# Altium PCB YLCmarlin.PcbDoc (part 2 of 3)
Units mm, origin at the board's own origin, x right, y up, seen from the top; angles counter-clockwise.
Board outline 129.92 x 100.67 mm, 2 copper layers (Top Layer, Bottom Layer); 209 components, 193 nets, 781 pads, 1168 vias.
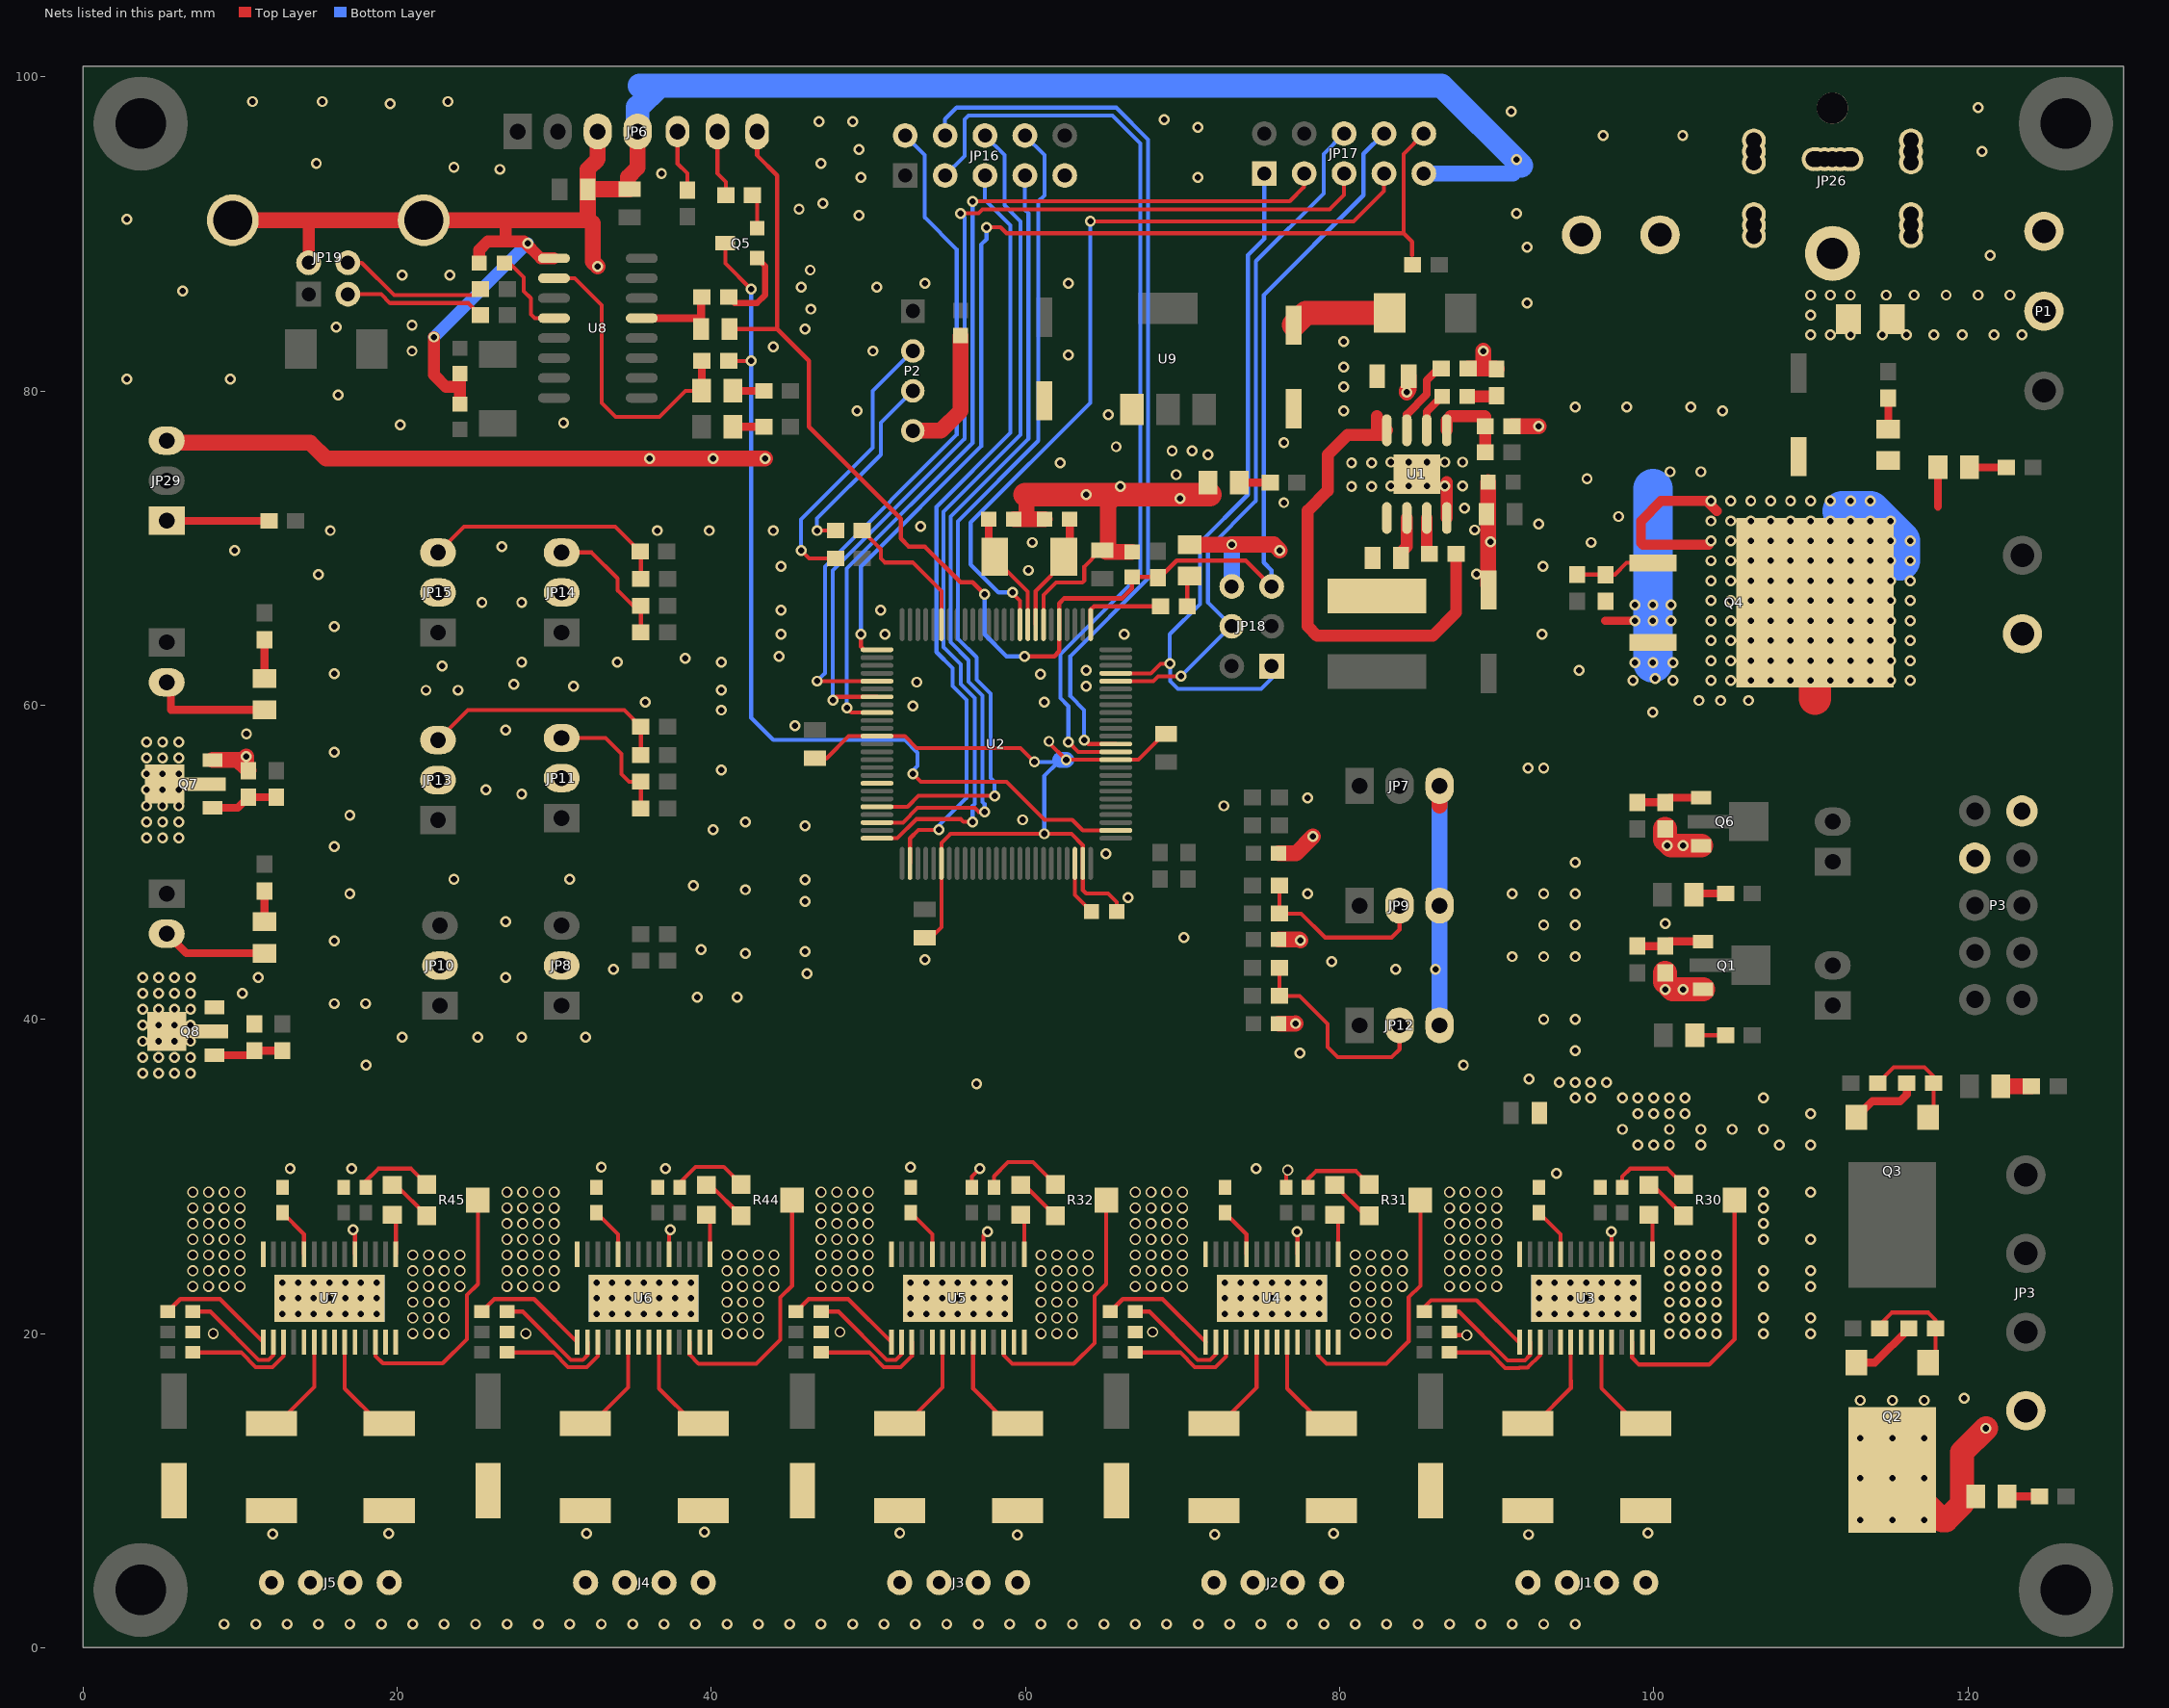
[diagram p2: the nets of this part, all layers, seen from the top]

## Via types
v1: diameter 0.7, hole 0.4, Top Layer to Bottom Layer, tented both sides, 830 vias
v2: diameter 0.7, hole 0.5, Top Layer to Bottom Layer, tented both sides, 230 vias
v3: diameter 0.7, hole 0.4, Top Layer to Bottom Layer, 108 vias

## Nets (pads, with @x,y where several pads share a name; then routed paths per layer and width w, separated by ;. In a path a pad name is that pad's centre, name@x,y a point inside that pad or via, vN(x,y) a via of type N, cw(c..) or ccw(c..) an arc to the next point about the centre after c; other vN are vias at no path point) (continued)
GND: C2.2 C3.2 C4.1 C5.1 C6.1 C7.2 C9.1 C10.1 C11.1 C12.1 C13.1 C14.1 C15.1 C16.1 C17.1 C18.1 C19.1 C20.2 C21.2 C22.2 C23.2 C24.2 C25.2 C26.2 C27.2 C28.2 C29.2 C30.2 C31.2 C38.2 C39.2 C40.2 C41.2 C42.2 C43.2 C44.2 C45.2 C46.2 C51.2 C52.2 C54.2 C55.2 C56.2 C57.2 C58.1 D3.2 D6.2 D12.2 JP1.2 JP6.3 JP6.4 JP7.3 JP8.2 JP9.3 JP10.2 JP11.2 JP12.3 JP13.2 JP14.2 JP15.2 JP16.9 JP17.9 JP18.6 JP19.4 JP19.5 JP19.6 JP26.0 JP26.2 JP29.3 P1.1 P2.4 P3.1 P3.4 Q1.2 Q2.3 Q3.3 Q4.3 Q6.2 Q7.2 Q8.2 R6.2 R7.1 R8.2 R9.2 R12.1 R16.1 R19.1 R30.3 R31.3 R32.3 R33.2 R34.2 R35.2 R36.1 R37.1 R38.1 R39.1 R40.1 R41.1 R44.3 R45.3 R46.2 R47.2 R48.1 R49.1 R50.1 R51.1 R69.1 R76.1 R79.1 U1.4 U1.9 U2.11 U2.32 U2.62 U2.81 U2.99 U3.13 U3.14 U3.19 U3.28 U3.29 U4.13 U4.14 U4.19 U4.28 U4.29 U5.13 U5.14 U5.19 U5.28 U5.29 U6.13 U6.14 U6.19 U6.28 U6.29 U7.13 U7.14 U7.19 U7.28 U7.29 U8.1 U9.1 | length 363.1
  Top Layer w0.254: v1(17.2,26.6) 17.325,26.475 U7.19@17.325,25.05 ; C52.2@19.7,29.45 19.95,29.45 R45.3@21.9,27.5 ; U6.19@37.325,25.05 37.325,26.525 v1(37.4,26.6) ; C51.2@39.7,29.45 39.95,29.45 R44.3@41.9,27.5 ; C10.1@46.726,56.604 47.323,56.604 48.75,58.031 U2.62@50.556,58.031 52.324,58.031 53.078,57.277 59.69,57.277 v1(60.579,56.388) ; C9.1@54.092,45.301 54.656,45.865 U2.81@54.656,49.931 54.656,51.237 55.235,51.816 v1(61.204,51.816) 62.928,51.816 63.656,51.088 U2.99@63.656,49.931 63.656,48.221 63.871,48.006 65.268,48.006 65.814,47.46 C56.2@65.814,46.863 ; C25.2@56.6,29.3 56.6,30 v1(57.1,30.5) ; U5.19@57.325,25.05 57.325,26.225 v1(57.6,26.5) ; C40.2@59.7,29.45 59.95,29.45 R32.3@61.9,27.5 ; U2.32@61.156,65.131 61.156,67.008 61.966,67.818 63.627,67.818 63.754,67.945 63.754,68.834 64.681,69.761 C12.1@65.141,69.761 ; v1(61.5,57.7) 61.5,57.616 v1@62.585,56.531 ; v1(62.601,56.515) v1@62.585,56.531 ; C11.1@68.961,58.177 68.845,58.177 67.199,56.531 U2.11@65.756,56.531 v1@62.585,56.531 ; JP18.6@72.507,67.564 JP18.6@73.142,67.564 ; C24.2@76.6,29.3 76.6,30.3 v2(76.7,30.4) ; v1(77.3,26.5) 77.325,26.475 U4.19@77.325,25.05 ; C39.2@79.7,29.45 81.65,27.5 R31.3@81.9,27.5 ; C29.2@87,20.1 87.2,19.9 v2(88.1,19.9) ; v1(97.3,26.5) 97.325,26.475 U3.19@97.325,25.05 ; C38.2@99.7,29.45 99.95,29.45 R30.3@101.9,27.5
  Top Layer w0.508: 96.907,65.383 v1(98.812,65.383) ; Q2.3@112.904,18.155 114.079,18.155 R12.1@116.244,20.32 ; Q3.3@112.904,33.776 113.926,34.798 115.697,34.798 116.117,35.218 R16.1@116.117,35.941
  Top Layer w0.762: 14.351,90.874 14.371,90.854 JP19.4@14.371,88.164 ; v1(22.352,83.439) 22.352,81.026 23.114,80.264 24.003,80.264 ; C54.2@24.003,79.159 24.003,80.264 ; C55.2@24.003,81.115 24.003,80.264 ; C18.1@25.235,88.138 25.235,88.989 25.781,89.535 26.924,89.535 ; 26.924,90.874 26.924,89.535 ; U8.1@29.993,88.451 29.151,88.451 28.067,89.535 26.924,89.535 ; U1.4@86.825,71.917 v1@86.825,74.203
  Top Layer w1.016: JP29.3@5.334,76.718 14.468,76.718 15.494,75.692 v1(43.434,75.692) ; Q7.2@8.251,56.515 9.867,56.515 R76.1@10.4,55.982 ; JP19.5@9.541,90.874 14.351,90.874 JP19.6@21.701,90.874 26.924,90.874 32.278,90.874 ; v1(10.4,56.74) R76.1@10.4,55.982 ; R76.1@10.541,55.841 R76.1@10.4,55.982 ; v1(32.766,87.938) 32.474,88.23 32.474,90.678 32.278,90.874 ; JP6.3@32.776,96.52 32.776,94.752 32.142,94.118 C14.1@32.142,92.837 ; C15.1@34.709,92.837 C15.1@34.709,92.848 ; C15.1@34.798,92.848 C15.1@34.709,92.848 ; JP6.4@35.311,96.52 35.311,94.225 34.709,93.623 C15.1@34.709,92.848 ; P2.4@52.832,77.47 54.61,77.47 55.88,78.74 C58.1@55.88,83.528 ; C21.2@59.266,71.844 C20.2@61.222,71.844 ; 60.071,71.844 60.071,73.279 ; C12.1@65.141,69.761 C12.1@65.268,69.761 ; 65.903,73.406 65.268,72.771 C12.1@65.268,69.761 ; C22.2@66.792,69.761 C12.1@65.268,69.761 ; D12.2@70.475,70.215 73.126,70.215 v1(73.142,70.231) 75.819,70.231 v1(76.2,69.85) ; C19.1@76.121,39.719 77.179,39.719 v1(77.2,39.74) ; C17.1@76.121,45.085 77.455,45.085 v1(77.5,45.04) ; C16.1@76.121,50.57 77.23,50.57 v1(78.3,51.64) ; v1@84.285,80.008 v1(84.285,79.918) 84.396,80.119 C4.1@84.396,80.934 ; 86.37,53.604 JP7.3@86.37,54.864 ; R6.2@88.183,81.442 89.154,81.442 ; v1(89.154,82.55) 89.154,81.442 ; C7.2@89.454,67.632 C5.1@89.454,74.203 ; R9.2@90,81.402 89.961,81.442 89.154,81.442 ; R8.2@90.977,77.759 v1(92.667,77.759) ; C14.1@32.142,92.837 32.142,91.01 32.278,90.874 ; C14.1@32.142,92.837 32.153,92.848 C15.1@34.709,92.848
  Top Layer w1.524: 60,73.406 65.903,73.406 71.745,73.406 ; R7.1@100.732,42.966 100.732,42.393 101.214,41.911 Q1.2@103.149,41.911 ; R69.1@100.732,52.116 100.732,51.442 101.113,51.061 Q6.2@103.022,51.061
  Bottom Layer w0.254: v1(60.579,56.388) 62.093,56.388 ; v1(61.204,51.816) 61.204,55.499 62.093,56.388 ; 62.22,56.515 62.093,56.388 ; v1(62.601,56.515) 62.474,56.388 62.093,56.388
  Bottom Layer w0.762: v1(22.352,83.439) v1(28.321,89.408)
  Bottom Layer w1.016: 62.22,56.515 v1(62.601,56.515) ; JP18.6@73.142,67.564 v1(73.142,70.231) ; JP17.9@85.369,93.848 91.054,93.848 91.567,94.361 ; JP12.3@86.37,39.624 JP7.3@86.37,54.864
  Bottom Layer w1.524: JP6.4@35.311,96.52 35.311,98.049 36.703,99.441 ; 35.433,99.441 36.703,99.441 ; 91.567,94.361 86.487,99.441 36.703,99.441
  Bottom Layer w2.54: v1(99.955,62.716) v1(99.955,65.383) v1(99.955,66.399) 99.955,73.765
  other v1: 9,1.5 11,1.5 13,1.5 15,1.5 17,1.5 19,1.5 21,1.5 23,1.5 25,1.5 27,1.5 29,1.5 31,1.5 33,1.5 35,1.5 37,1.5 39,1.5 41,1.5 43,1.5 45,1.5 47,1.5 49,1.5 51,1.5 53,1.5 55,1.5 57,1.5 59,1.5 61,1.5 63,1.5 65,1.5 67,1.5 69,1.5 71,1.5 73,1.5 75,1.5 77,1.5 79,1.5 81,1.5 83,1.5 85,1.5 87,1.5 89,1.5 91,1.5 93,1.5 95,1.5 59.5,7.175 92.025,7.2 72.05,7.225 12.075,7.25 19.475,7.275 32.075,7.275 79.625,7.275 52,7.3 99.625,7.3 39.575,7.375 101,20 102,20 103,20 104,20 107,20 110,20 101,21 102,21 103,21 104,21 107,21 110,21 101,22 102,22 103,22 104,22 101,23 102,23 103,23 104,23 107,23 110,23 101,24 102,24 103,24 104,24 107,24 110,24 101,25 102,25 103,25 104,25 107,26 110,26 107,27 107,28 107,29 110,29 93.8,30.2 13.2,30.5 17.1,30.5 37.1,30.5 74.7,30.5 33,30.6 52.7,30.6 99,32 100,32 101,32 103,32 108,32 110,32 98,33 101,33 103,33 105,33 107,33 99,34 100,34 101,34 102,34 110,34 95,35 96,35 98,35 99,35 100,35 101,35 102,35 107,35 56.9,35.9 94,36 95,36 96,36 97,36 92.075,36.195 18.034,37.084 87.884,37.084 77.47,37.846 95,38 20.32,38.862 25.146,38.862 27.94,38.862 32.004,38.862 93,40 95,40 16,41 18,41 39.116,41.402 41.656,41.402 100.732,41.911 101.875,41.911 26.924,42.672 46.101,42.926 33.782,43.18 83.566,43.18 86.106,43.18 79.502,43.688 53.594,43.815 91,44 93,44 95,44 42.164,44.196 45.974,44.323 39.37,44.45 16,45 70.104,45.212 93,46 95,46 100.732,46.102 26.924,46.228 45.974,47.498 66.538,47.752 17,48 77.978,48.006 91,48 93,48 95,48 42.164,48.26 38.862,48.514 45.974,48.895 23.622,48.924 30.988,48.924 95,50 65.141,50.546 16,51 100.859,51.061 101.875,51.061 40.132,52.07 45.974,52.324 42.164,52.578 59.817,52.705 17,53 72.644,53.594 77.978,54.102 27.94,54.356 25.654,54.61 40.64,55.88 92,56 93,56 16,57 26.924,58.42 45.33,58.7 99.937,59.563 40.64,59.69 52.832,59.944 35.814,60.198 61.214,60.198 21.844,60.95 23.876,60.95 40.64,60.96 31.242,61.214 63.881,61.214 27.432,61.331 53.086,61.468 98.685,61.573 101.225,61.573 100.082,61.7 60.96,61.976 16,62 63.881,62.23 95.25,62.23 22.86,62.484 98.812,62.716 101.225,62.716 27.94,62.738 34.036,62.738 40.64,62.738 38.354,62.992 44.323,63.119 44.45,64.516 51.054,64.516 66.294,64.516 92.892,64.516 16,65 101.098,65.383 44.45,66.04 50.8,66.04 98.812,66.399 101.098,66.399 25.4,66.548 27.94,66.548 14.986,68.326 88.73,68.361 60.198,68.58 44.45,68.834 92.964,68.834 9.652,69.85 26.67,70.104 60.452,70.358 96.012,70.358 89.619,70.393 15.748,71.12 36.576,71.12 39.878,71.12 43.942,71.12 88.603,71.155 53.34,71.374 92.667,71.536 97.767,72.011 87.968,72.552 76.454,72.898 69.85,73.152 63.881,73.406 66.04,73.914 80.772,73.914 82.042,73.914 83.269,73.949 84.412,73.949 85.555,73.949 86.698,73.949 87.841,73.949 95.758,74.422 69.596,74.676 101.051,74.86 103.003,74.86 62.23,75.438 80.772,75.438 82.042,75.438 83.269,75.473 84.412,75.473 85.555,75.473 86.698,75.473 87.841,75.473 36.068,75.692 40.132,75.692 71.628,75.946 69.342,76.2 70.612,76.2 65.786,76.454 76.454,76.708 20.193,77.851 30.607,77.978 65.278,78.486 49.276,78.74 80.264,78.74 104.394,78.74 94.996,78.994 98.298,78.994 102.362,78.994 16.256,79.756 80.264,80.264 2.794,80.772 9.398,80.772 80.264,81.534 62.738,82.296 20.955,82.55 50.292,82.55 43.942,82.804 80.264,83.159 45.974,83.947 16.129,84.074 20.955,84.201 46.355,85.217 91.948,85.598 6.35,86.36 45.72,86.614 50.546,86.614 53.594,86.868 62.738,86.868 20.32,87.376 23.368,87.376 46.3,87.7 121.412,88.646 91.948,89.154 2.794,90.932 49.403,91.186 91.264,91.313 45.593,91.567 47.117,91.948 49.53,93.599 70.993,93.599 36.83,93.853 26.543,94.107 23.622,94.234 14.859,94.488 46.99,94.488 91.264,94.742 120.904,95.25 49.403,95.377 96.774,96.266 101.854,96.266 70.993,96.774 46.863,97.155 49.022,97.155 68.834,97.282 90.932,97.79 120.65,98.044 19.558,98.298 10.795,98.425 15.24,98.425 23.241,98.425
  other v2: 8.3,20 21,20 22,20 23,20 28.2,20 41,20 42,20 43,20 61,20 62,20 63,20 81,20 82,20 83,20 48.2,20.1 68.1,20.1 21,21 22,21 23,21 41,21 42,21 43,21 61,21 62,21 63,21 81,21 82,21 83,21 21,22 22,22 23,22 41,22 42,22 43,22 61,22 62,22 63,22 81,22 82,22 83,22 7,23 8,23 9,23 10,23 21,23 22,23 23,23 24,23 27,23 28,23 29,23 30,23 41,23 42,23 43,23 44,23 47,23 48,23 49,23 50,23 61,23 62,23 63,23 64,23 67,23 68,23 69,23 70,23 81,23 82,23 83,23 84,23 87,23 88,23 89,23 90,23 7,24 8,24 9,24 10,24 21,24 22,24 23,24 24,24 27,24 28,24 29,24 30,24 41,24 42,24 43,24 44,24 47,24 48,24 49,24 50,24 61,24 62,24 63,24 64,24 67,24 68,24 69,24 70,24 81,24 82,24 83,24 84,24 87,24 88,24 89,24 90,24 7,25 8,25 9,25 10,25 21,25 22,25 23,25 24,25 27,25 28,25 29,25 30,25 41,25 42,25 43,25 44,25 47,25 48,25 49,25 50,25 61,25 62,25 63,25 64,25 67,25 68,25 69,25 70,25 81,25 82,25 83,25 84,25 87,25 88,25 89,25 90,25 7,26 8,26 9,26 10,26 27,26 28,26 29,26 30,26 47,26 48,26 49,26 50,26 67,26 68,26 69,26 70,26 87,26 88,26 89,26 90,26 7,27 8,27 9,27 10,27 27,27 28,27 29,27 30,27 47,27 48,27 49,27 50,27 67,27 68,27 69,27 70,27 87,27 88,27 89,27 90,27 7,28 8,28 9,28 10,28 27,28 28,28 29,28 30,28 47,28 48,28 49,28 50,28 67,28 68,28 69,28 70,28 87,28 88,28 89,28 90,28 7,29 8,29 9,29 10,29 27,29 28,29 29,29 30,29 47,29 48,29 49,29 50,29 67,29 68,29 69,29 70,29 87,29 88,29 89,29 90,29
  other v3: 12.7,21.25 13.7,21.25 14.7,21.25 15.7,21.25 16.7,21.25 17.7,21.25 18.7,21.25 32.7,21.25 33.7,21.25 34.7,21.25 35.7,21.25 36.7,21.25 37.7,21.25 38.7,21.25 52.7,21.25 53.7,21.25 54.7,21.25 55.7,21.25 56.7,21.25 57.7,21.25 58.7,21.25 72.7,21.25 73.7,21.25 74.7,21.25 75.7,21.25 76.7,21.25 77.7,21.25 78.7,21.25 92.7,21.25 93.7,21.25 94.7,21.25 95.7,21.25 96.7,21.25 97.7,21.25 98.7,21.25 12.7,22.25 13.7,22.25 14.7,22.25 15.7,22.25 16.7,22.25 17.7,22.25 18.7,22.25 32.7,22.25 33.7,22.25 34.7,22.25 35.7,22.25 36.7,22.25 37.7,22.25 38.7,22.25 52.7,22.25 53.7,22.25 54.7,22.25 55.7,22.25 56.7,22.25 57.7,22.25 58.7,22.25 72.7,22.25 73.7,22.25 74.7,22.25 75.7,22.25 76.7,22.25 77.7,22.25 78.7,22.25 92.7,22.25 93.7,22.25 94.7,22.25 95.7,22.25 96.7,22.25 97.7,22.25 98.7,22.25 12.7,23.25 13.7,23.25 14.7,23.25 15.7,23.25 16.7,23.25 17.7,23.25 18.7,23.25 32.7,23.25 33.7,23.25 34.7,23.25 35.7,23.25 36.7,23.25 37.7,23.25 38.7,23.25 52.7,23.25 53.7,23.25 54.7,23.25 55.7,23.25 56.7,23.25 57.7,23.25 58.7,23.25 72.7,23.25 73.7,23.25 74.7,23.25 75.7,23.25 76.7,23.25 77.7,23.25 78.7,23.25 92.7,23.25 93.7,23.25 94.7,23.25 95.7,23.25 96.7,23.25 97.7,23.25 98.7,23.25 10.16,41.656 11.176,42.672 10.414,58.166
K1: JP17.3 U2.59 | length 60
  Top Layer w0.254: v1(48.631,59.817) 48.917,59.531 U2.59@50.556,59.531 ; v1(56.642,92.075) 76.835,92.075 77.749,92.989 JP17.3@77.749,93.848
  Bottom Layer w0.254: v1(48.631,59.817) 48.631,65.141 48.631,68.697 56.642,76.708 v1(56.642,92.075)
K2: JP17.5 U2.57 | length 63.7
  Top Layer w0.254: v1(47.742,60.325) 47.948,60.531 U2.57@50.556,60.531 ; v1(55.88,91.313) 57.023,91.313 57.277,91.567 79.375,91.567 80.289,92.481 JP17.5@80.289,93.848
  Bottom Layer w0.254: v1(47.742,60.325) 47.742,68.57 56.134,76.962 56.134,91.059 v1(55.88,91.313)
K3: JP16.2 U2.55 | length 43.6
  Top Layer w0.254: v1(46.736,61.531) U2.55@50.556,61.531
  Bottom Layer w0.254: v1(46.736,61.531) 47.244,62.039 47.244,68.834 55.626,77.216 55.626,89.027 53.594,91.059 53.594,95.016 JP16.2@52.349,96.261
KILL: JP17.10 R20.1 U2.51 | length 66.3
  Top Layer w0.254: v1(49.53,64.516) 49.53,63.744 49.743,63.531 U2.51@50.556,63.531 ; v1(57.531,90.424) 58.42,90.424 58.801,90.043 84.074,90.043 ; 84.621,88.646 84.621,89.496 84.074,90.043 ; JP17.10@85.369,96.388 84.074,95.093 84.074,90.043
  Bottom Layer w0.254: v1(49.53,64.516) 49.53,68.834 57.188,76.492 57.188,89.319 57.531,89.662 v1(57.531,90.424)
LCD_D4: JP16.5 U2.77 | length 49.5
  Top Layer w0.254: U2.77@52.656,49.931 52.656,51.523 53.203,52.07 53.975,52.07 v1(54.483,52.07)
  Bottom Layer w0.254: v1(54.483,52.07) 54.483,52.324 56.261,54.102 56.261,60.332 55.372,61.221 55.372,62.357 54.343,63.386 54.343,72.631 59.055,77.343 59.055,90.551 57.429,92.177 JP16.5@57.429,93.721
LCD_D5: JP16.6 U2.75 | length 54.2
  Top Layer w0.254: U2.75@50.556,51.531 51.848,51.531 53.07,52.753 55.88,52.753 56.055,52.578 v1(56.642,52.578)
  Bottom Layer w0.254: v1(56.642,52.578) 56.642,53.594 56.769,53.721 56.769,60.466 55.88,61.355 55.88,62.611 54.797,63.694 54.797,72.323 59.69,77.216 59.69,90.805 58.674,91.821 58.674,95.016 JP16.6@57.429,96.261
LCD_D6: JP16.7 U2.73 | length 50.9
  Top Layer w0.254: U2.73@50.556,52.531 52.206,52.531 53.142,53.467 56.769,53.467 57.023,53.213 v1(57.404,53.213)
  Bottom Layer w0.254: v1(57.404,53.213) 57.404,53.721 57.277,53.848 57.277,60.6 56.388,61.489 56.388,62.865 55.251,64.002 55.251,72.015 60.198,76.962 60.198,91.313 59.969,91.542 JP16.7@59.969,93.721
LCD_D7: JP16.8 U2.71 | length 53.3
  Top Layer w0.254: U2.71@50.556,53.531 52.505,53.531 53.203,54.229 v1@57.785,54.229
  Bottom Layer w0.254: v1(58.039,54.229) 58.039,55.118 57.785,55.372 57.785,60.734 56.896,61.623 56.896,63.046 55.705,64.237 55.705,71.707 60.833,76.835 60.833,92.075 61.214,92.456 61.214,95.016 JP16.8@59.969,96.261
LCD_EN: JP16.3 U2.12 | length 59.8
  Top Layer w0.254: v1(62.738,57.658) 63.365,57.031 U2.12@65.756,57.031
  Bottom Layer w0.254: JP16.3@54.889,93.721 56.134,94.966 56.134,97.282 56.388,97.536 65.532,97.536 67.31,95.758 67.31,68.326 62.23,63.246 62.23,60.452 62.738,59.944 v1(62.738,57.658)
LCD_RS: JP16.4 U2.13 | length 57.7
  Top Layer w0.254: v1(63.754,57.785) 64.008,57.531 U2.13@65.756,57.531
  Bottom Layer w0.254: JP16.4@54.889,96.261 54.889,97.307 55.626,98.044 65.786,98.044 67.818,96.012 67.818,68.072 62.865,63.119 62.865,60.579 63.744,59.7 63.744,57.922 v1@63.754,57.912
LIGHT: U2.68
NetC1_1: C1.1 L1.1 U1.1
NetC1_2: C1.2 U1.2 | length 2.5
  Top Layer w0.762: C1.2@83.815,69.631 84.285,70.101 U1.2@84.285,71.917
NetC2_1: C2.1 C4.2 D1.2 R3.1 U1.8 | length 38
  Top Layer w0.762: 82.38,77.632 82.38,78.14 ; 82.38,78.394 82.38,78.14 ; R3.1@87.421,69.631 87.421,65.908 85.936,64.424 78.578,64.424 77.978,65.024 77.978,72.39 79.248,73.66 79.248,75.946 80.518,77.216 82.727,77.216 U1.8@83.015,77.505 82.38,78.14
  Top Layer w1.524: C2.1@77.089,84.197 77.859,84.966 D1.2@83.196,84.966
NetC8_1: C8.1 R9.1 | length 1.9
  Top Layer w0.762: C8.1@88.133,79.664 89.961,79.664 R9.1@90,79.703
NetC8_2: C8.2 U1.6 | length 2.6
  Top Layer w0.508: U1.6@85.555,77.505 85.555,78.686 C8.2@86.533,79.664
NetC18_2: C18.2 U8.4 | length 5.7
  Top Layer w0.254: C18.2@26.835,88.138 27.178,88.138 28.067,87.249 28.067,86.36 28.521,85.906 28.521,84.89 28.77,84.641 U8.4@29.993,84.641
NetC32_2: C32.2 U3.3 | length 7.4
  Top Layer w0.254: C32.2@87,18.8 89.558,18.8 90.558,17.8 91.438,17.8 91.465,17.827 91.969,17.827 92.775,18.633 U3.3@92.775,19.45
NetC33_2: C33.2 U4.3 | length 7.4
  Top Layer w0.254: C33.2@67,18.8 69.858,18.8 70.789,17.869 72.107,17.869 72.775,18.537 U4.3@72.775,19.45
NetC34_2: C34.2 U5.3 | length 7.3
  Top Layer w0.254: C34.2@47,18.8 50.058,18.8 50.989,17.869 52.069,17.869 52.775,18.575 U5.3@52.775,19.45
NetC35_1: C35.1 U3.2 | length 7.4
  Top Layer w0.254: C35.1@87,21.4 87.6,21.4 90.7,18.3 91.8,18.3 92.125,18.625 U3.2@92.125,19.45
NetC35_2: C35.2 U3.1 | length 7.7
  Top Layer w0.254: C35.2@85.4,21.4 85.4,21.7 85.827,22.127 88.727,22.127 91.404,19.45 U3.1@91.475,19.45
NetC36_1: C36.1 U4.2 | length 7.3
  Top Layer w0.254: C36.1@67,21.4 67.9,21.4 70.977,18.323 71.76,18.323 72.125,18.688 U4.2@72.125,19.45
NetC36_2: C36.2 U4.1 | length 7.5
  Top Layer w0.254: C36.2@65.4,21.4 66.2,22.2 68.725,22.2 U4.1@71.475,19.45
NetC37_1: C37.1 U5.2 | length 7.3
  Top Layer w0.254: C37.1@47,21.4 48.1,21.4 51.177,18.323 51.76,18.323 52.125,18.688 U5.2@52.125,19.45
NetC37_2: C37.2 U5.1 | length 7.5
  Top Layer w0.254: C37.2@45.4,21.4 46.2,22.2 48.725,22.2 U5.1@51.475,19.45
NetC38_1: C38.1 U3.15 | length 2.7
  Top Layer w0.254: C38.1@99.5,27.55 C38.1@99.6,27.45 ; C38.1@99.7,27.55 99.925,27.325 U3.15@99.925,25.05
NetC39_1: C39.1 U4.15 | length 2.6
  Top Layer w0.254: C39.1@79.7,27.55 79.925,27.325 U4.15@79.925,25.05
NetC40_1: C40.1 U5.15 | length 2.6
  Top Layer w0.254: C40.1@59.7,27.55 59.925,27.325 U5.15@59.925,25.05
NetC47_2: C47.2 U6.3 | length 7.3
  Top Layer w0.254: C47.2@27,18.8 29.958,18.8 30.889,17.869 32.069,17.869 32.775,18.575 U6.3@32.775,19.45
NetC48_2: C48.2 U7.3 | length 7.3
  Top Layer w0.254: C48.2@7,18.8 10.071,18.8 11.002,17.869 12.069,17.869 12.775,18.575 U7.3@12.775,19.45
NetC49_1: C49.1 U6.2 | length 7.3
  Top Layer w0.254: C49.1@27,21.4 28,21.4 31.077,18.323 31.823,18.323 32.125,18.625 U6.2@32.125,19.45
NetC49_2: C49.2 U6.1 | length 7.5
  Top Layer w0.254: C49.2@25.4,21.4 26.2,22.2 28.725,22.2 U6.1@31.475,19.45
NetC50_1: C50.1 U7.2 | length 7.3
  Top Layer w0.254: C50.1@7,21.4 8.113,21.4 11.19,18.323 11.823,18.323 12.125,18.625 U7.2@12.125,19.45
NetC50_2: C50.2 U7.1 | length 7.5
  Top Layer w0.254: C50.2@5.4,21.4 6.2,22.2 8.725,22.2 U7.1@11.475,19.45
NetC51_1: C51.1 U6.15 | length 2.6
  Top Layer w0.254: C51.1@39.7,27.55 39.925,27.325 U6.15@39.925,25.05
NetC52_1: C52.1 U7.15 | length 2.6
  Top Layer w0.254: C52.1@19.7,27.55 19.925,27.325 U7.15@19.925,25.05
NetC53_1: C53.1 R72.1 U8.13 | length 5.8
  Top Layer w0.508: U8.13@35.581,84.641 C53.1@39.359,84.641 ; C53.1@39.359,83.947 C53.1@39.359,84.641 ; R72.1@39.409,85.979 39.429,85.959 39.359,85.89 C53.1@39.359,84.641
NetC56_1: C56.1 U2.98 | length 3.5
  Top Layer w0.254: U2.98@63.156,49.931 63.156,47.921 C56.1@64.214,46.863
NetD2_1: D2.1 R1.2 | length 2
  Top Layer w0.254: D2.1@102.621,38.99 R1.2@104.581,38.99
NetD3_1: D3.1 R2.2 | length 2
  Top Layer w0.508: D3.1@114.935,77.581 R2.2@114.935,79.541
NetD4_1: D4.1 R10.2 | length 2.1
  Top Layer w0.508: D4.1@122.5,9.64 R10.2@124.55,9.64
NetD4_2: D4.2 JP3.4 Q2.2 | length 12.5
  Top Layer w0.508: 119.634,9.64 D4.2@120.5,9.64
  Top Layer w1.524: Q2.2@115.189,11.309 118.37,8.128 118.618,8.128 119.634,9.144 119.634,9.64 119.634,12.446 v1(121.158,13.97)
  other v1: 113.157,8.128 115.189,8.128 117.221,8.128 113.157,10.795 115.189,10.795 117.221,10.795 113.157,13.335 115.189,13.335 117.221,13.335 113.157,15.748 115.189,15.748 117.221,15.748 119.761,15.875
NetD5_1: D5.1 R13.2 | length 2
  Top Layer w1.016: D5.1@122.1,35.74 R13.2@124.05,35.74
NetD6_1: D6.1 R15.2 | length 2
  Top Layer w0.508: D6.1@73.882,74.168 R15.2@75.842,74.168
NetD7_1: D7.1 R17.2 | length 2.4
  Top Layer w0.508: D7.1@120.1,75.14 R17.2@122.45,75.14
NetD7_2: D7.2 JP5.2 Q4.2 | length 25.7
  Top Layer w0.508: 118.1,72.634 D7.2@118.1,75.14
  Top Layer w0.635: v1@103.502,70.218 99.311,70.218 99.193,70.336 99.193,71.733 100.463,73.003 103.384,73.003 104.019,72.368
  Top Layer w2.032: 110.263,60.409 Q4.2@110.263,66.526
  Bottom Layer w2.54: 112.02,72.368 113.798,72.368 115.703,70.463 115.703,69.193
  other v1: 102.876,60.303 104.273,60.303 106.051,60.303 103.638,61.573 104.908,61.573 106.178,61.573 107.448,61.573 108.718,61.573 109.988,61.573 111.258,61.573 112.528,61.573 113.798,61.573 115.068,61.573 116.338,61.573 103.638,62.843 104.908,62.843 106.178,62.843 107.448,62.843 108.718,62.843 109.988,62.843 111.258,62.843 112.528,62.843 113.798,62.843 115.068,62.843 116.338,62.843 103.638,64.113 104.908,64.113 106.178,64.113 107.448,64.113 108.718,64.113 109.988,64.113 111.258,64.113 112.528,64.113 113.798,64.113 115.068,64.113 116.338,64.113 103.638,65.383 104.908,65.383 106.178,65.383 107.448,65.383 108.718,65.383 109.988,65.383 111.258,65.383 112.528,65.383 113.798,65.383 115.068,65.383 116.338,65.383 103.638,66.653 104.908,66.653 106.178,66.653 107.448,66.653 108.718,66.653 109.988,66.653 111.258,66.653 112.528,66.653 113.798,66.653 115.068,66.653 116.338,66.653 103.638,67.923 104.908,67.923 106.178,67.923 107.448,67.923 108.718,67.923 109.988,67.923 111.258,67.923 112.528,67.923 113.798,67.923 115.068,67.923 116.338,67.923 103.638,69.193 104.908,69.193 106.178,69.193 107.448,69.193 108.718,69.193 109.988,69.193 111.258,69.193 112.528,69.193 113.798,69.193 115.068,69.193 116.338,69.193 103.638,70.463 104.908,70.463 106.178,70.463 107.448,70.463 108.718,70.463 109.988,70.463 111.258,70.463 112.528,70.463 113.798,70.463 115.068,70.463 116.338,70.463 103.638,71.733 104.908,71.733 106.178,71.733 107.448,71.733 108.718,71.733 109.988,71.733 111.258,71.733 112.528,71.733 113.798,71.733 115.068,71.733 103.638,73.003 104.908,73.003 106.178,73.003 107.448,73.003 108.718,73.003 109.988,73.003 111.258,73.003 112.528,73.003 113.798,73.003
NetD8_1: D8.1 R65.1 | length 2
  Top Layer w0.508: D8.1@41.386,77.724 R65.1@43.346,77.724
NetD9_1: D9.1 R67.2 | length 2
  Top Layer w0.508: D9.1@102.562,47.95 102.63,48.018 R67.2@104.581,48.018
NetD10_1: D10.1 R66.1 | length 2
  Top Layer w0.508: D10.1@41.386,80.01 R66.1@43.346,80.01
NetD10_2: D10.2 R25.2 U8.2 | length 19.3
  Top Layer w0.254: U8.2@29.993,87.181 31.31,87.181 33.02,85.471 33.02,79.248 33.909,78.359 36.703,78.359 38.354,80.01 D10.2@39.386,80.01
  Top Layer w0.508: D10.2@39.386,80.01 39.409,80.033 R25.2@39.409,81.915
NetD12_1: D12.1 R73.2 | length 2.1
  Top Layer w0.279: R73.2@70.237,66.294 R73.2@70.309,66.294 70.309,68.049 D12.1@70.475,68.215
NetD13_1: D13.1 R74.2 | length 2.5
  Top Layer w0.508: D13.1@11.557,61.706 R74.2@11.557,64.174
NetD13_2: D13.2 JP4.2 Q7.3 | length 7.8
  Top Layer w0.508: JP4.2@5.334,61.458 5.604,61.188 5.604,59.706 D13.2@11.557,59.706
  other v1: 4.064,51.562 5.08,51.562 6.096,51.562 4.064,52.578 5.08,52.578 6.096,52.578 4.064,53.594 5.08,53.594 6.096,53.594 4.064,54.61 5.08,54.61 6.096,54.61 4.064,55.626 5.08,55.626 6.096,55.626 4.064,56.642 5.08,56.642 6.096,56.642 4.064,57.658 5.08,57.658 6.096,57.658
NetD14_1: D14.1 R77.2 | length 2
  Top Layer w0.508: D14.1@11.557,46.212 R77.2@11.557,48.172
NetD14_2: D14.2 JP27.2 Q8.3 | length 6.7
  Top Layer w0.508: JP27.2@5.334,45.456 6.578,44.212 D14.2@11.557,44.212
  other v1: 3.81,36.576 4.826,36.576 5.842,36.576 6.858,36.576 3.81,37.592 4.826,37.592 5.842,37.592 6.858,37.592 3.81,38.608 4.826,38.608 5.842,38.608 6.858,38.608 3.81,39.624 4.826,39.624 5.842,39.624 6.858,39.624 3.81,40.64 4.826,40.64 5.842,40.64 6.858,40.64 3.81,41.656 4.826,41.656 5.842,41.656 6.858,41.656 3.81,42.672 4.826,42.672 5.842,42.672 6.858,42.672
NetF1_1: F1.1 P1.2
  other v1: 114.554,83.566 116.078,83.566 117.841,83.566 119.634,83.566 121.666,83.566 123.444,83.566 114.808,86.106 116.586,86.106 118.618,86.106 120.65,86.106 122.682,86.106
NetF1_2: F1.2 JP1.1 JP26.1
  other v1: 109.982,83.566 111.252,83.566 112.522,83.566 109.982,84.836 109.982,86.106 111.252,86.106 112.522,86.106
NetJ1_1: J1.1 U3.10
NetJ1_2: J1.2 U3.8
NetJ1_3: J1.3 U3.7
NetJ1_4: J1.4 U3.5
NetJ2_1: J2.1 U4.10
NetJ2_2: J2.2 U4.8
NetJ2_3: J2.3 U4.7
NetJ2_4: J2.4 U4.5
NetJ3_1: J3.1 U5.10
NetJ3_2: J3.2 U5.8
NetJ3_3: J3.3 U5.7
NetJ3_4: J3.4 U5.5
NetJ4_1: J4.1 U6.10
NetJ4_2: J4.2 U6.8
NetJ4_3: J4.3 U6.7
NetJ4_4: J4.4 U6.5
NetJ5_1: J5.1 U7.10
NetJ5_2: J5.2 U7.8
NetJ5_3: J5.3 U7.7
NetJ5_4: J5.4 U7.5
NetJP6_5: JP6.5 R63.1 | length 4
  Top Layer w0.254: JP6.5@37.856,96.52 37.856,94.478 38.481,93.853 R63.1@38.481,92.798
NetJP6_6: JP6.6 R64.1 | length 4.3
  Top Layer w0.254: JP6.6@40.396,96.52 40.396,93.853 40.933,93.316 R64.1@40.933,92.456
NetJP9_2: JP9.2 R61.2 R89.2 | length 11.8
  Top Layer w0.254: R61.2@76.171,48.514 R89.2@76.171,46.736 77.558,46.736 79.082,45.212 83.312,45.212 83.82,45.72 JP9.2@83.82,47.244
NetJP11_3: JP11.3 R56.2 R57.1 | length 8.6
  Top Layer w0.254: JP11.3@30.48,57.912 33.274,57.912 34.29,56.896 34.29,55.626 34.783,55.133 R56.2@35.523,55.133 R57.1@35.523,53.433
NetJP12_2: JP12.2 R62.2 R90.2 | length 13.6
  Top Layer w0.254: R62.2@76.171,43.275 R90.2@76.171,41.497 77.463,41.497 79.248,39.712 79.248,38.237 79.893,37.592 83.312,37.592 83.82,38.1 JP12.2@83.82,39.624
NetJP13_3: JP13.3 R58.2 R59.1 | length 15.9
  Top Layer w0.254: JP13.3@22.606,57.785 24.511,59.69 34.466,59.69 R59.1@35.523,58.633 R58.2@35.523,56.833
NetJP14_3: JP14.3 R21.2 R22.1 | length 8.6
  Top Layer w0.254: JP14.3@30.48,69.723 32.385,69.723 34.036,68.072 34.036,67.31 35.013,66.333 R21.2@35.523,66.333 R22.1@35.523,64.633
NetJP15_3: JP15.3 R23.2 R24.1 | length 16
  Top Layer w0.254: JP15.3@22.606,69.723 24.257,71.374 33.884,71.374 R24.1@35.472,69.786 35.523,69.735 R23.2@35.523,68.033
NetJP19_2: JP19.2 R70.1 | length 9
  Top Layer w0.254: JP19.2@16.871,86.164 18.992,86.164 19.558,85.598 24.55,85.598 R70.1@25.312,84.836
NetJP19_3: JP19.3 R71.1 | length 9.5
  Top Layer w0.254: JP19.3@16.871,88.164 17.754,88.164 19.812,86.106 24.931,86.106 R71.1@25.312,86.487
NetJP29_1: JP29.1 R83.1 | length 6.5
  Top Layer w0.508: JP29.1@5.334,71.745 5.339,71.74 R83.1@11.85,71.74
NetP2_2: P2.2 R80.2 | length 18.1
  Top Layer w0.254: v1(45.72,69.85) 46.228,69.342 R80.2@47.918,69.342
  Bottom Layer w0.254: v1(45.72,69.85) 45.72,71.821 50.292,76.393 50.292,80.01 P2.2@52.832,82.55
NetP2_3: P2.3 R81.2 | length 12.6
  Top Layer w0.254: v1(46.736,71.12) R81.2@47.918,71.12
  Bottom Layer w0.254: v1(46.736,71.12) 46.736,71.882 50.8,75.946 50.8,77.978 P2.3@52.832,80.01
NetQ1_1: Q1.1 R5.2 R7.2 | length 4.3
  Top Layer w0.508: R5.2@98.954,44.666 R7.2@100.732,44.666 101.025,44.959 Q1.1@103.149,44.959
NetQ2_1: Q2.1 R11.2 R12.2 | length 7.3
  Top Layer w0.254: R11.2@114.134,20.32 115.15,21.336 117.475,21.336 117.944,20.867 R12.2@117.944,20.32 117.944,18.625 Q2.1@117.474,18.155
NetQ3_1: Q3.1 R14.2 R16.2 | length 7
  Top Layer w0.254: R14.2@114.261,35.941 115.277,36.957 117.236,36.957 117.817,36.376 R16.2@117.817,35.941 117.817,34.119 Q3.1@117.474,33.776
NetQ4_1: Q4.1 R18.2 R19.2 | length 5.1
  Top Layer w0.254: R18.2@95.129,68.317 97.527,68.317 98.276,69.066 Q4.1@99.963,69.066
NetQ5_1: Q5.1 R72.2 | length 5.3
  Top Layer w0.381: R72.2@41.109,85.979 41.49,85.598 42.926,85.598 43.434,86.106 43.434,87.947 Q5.1@42.926,88.456
NetQ5_2: Q5.2 R64.2 | length 2.2
  Top Layer w0.254: R64.2@42.633,92.456 42.926,92.163 Q5.2@42.926,90.361
NetQ6_1: Q6.1 R68.2 R69.2 | length 4.2
  Top Layer w0.508: R68.2@98.954,53.816 R69.2@100.732,53.816 101.025,54.109 Q6.1@103.022,54.109
NetQ7_1: Q7.1 R75.2 R76.2 | length 4.3
  Top Layer w0.508: Q7.1@8.251,53.467 9.867,53.467 R76.2@10.541,54.141 R75.2@12.319,54.141
NetQ8_1: Q8.1 R78.2 R79.2 | length 4.4
  Top Layer w0.508: Q8.1@8.378,37.719 10.629,37.719 R79.2@10.922,38.012 R78.2@12.7,38.012
NetR3_2: R3.2 U1.3 | length 2.4
  Top Layer w0.762: U1.3@85.555,71.917 85.555,69.797 R3.2@85.722,69.63
NetR4_2: R4.2 R8.1 U1.5 | length 5.5
  Top Layer w0.762: U1.5@86.825,77.505 86.825,78.14 87.079,78.394 89.224,78.394 89.238,78.408 89.278,78.369 R8.1@89.278,77.758 R4.2@89.278,76.107
NetR6_1: R6.1 U1.7 | length 4.9
  Top Layer w0.508: U1.7@84.285,77.505 84.285,78.521 85.555,79.791 85.555,80.68 86.317,81.441 R6.1@86.484,81.441
NetR27_1: R27.1 R30.1 | length 5.2
  Top Layer w0.254: R27.1@98,29.3 98,30 98.5,30.5 100.869,30.5 101.869,29.5 R30.1@101.9,29.5
NetR28_1: R28.1 R31.1 | length 5
  Top Layer w0.254: R28.1@78,29.3 78,29.843 78.504,30.347 81.053,30.347 R31.1@81.9,29.5
NetR29_1: R29.1 R32.1 | length 5.6
  Top Layer w0.254: R29.1@58,29.3 58,30.011 58.9,30.911 60.489,30.911 R32.1@61.9,29.5
NetR30_2: R30.2 U3.12 | length 17.2
  Top Layer w0.254: U3.12@98.625,19.45 98.625,18.475 99.073,18.027 103.527,18.027 105.15,19.65 R30.2@105.15,28.5
NetR31_2: R31.2 U4.12 | length 16.7
  Top Layer w0.254: U4.12@78.625,19.45 78.625,18.625 79.175,18.075 82.975,18.075 84.4,19.5 84.4,22.3 85.15,23.05 R31.2@85.15,28.5
NetR32_2: R32.2 U5.12 | length 16.8
  Top Layer w0.254: U5.12@58.625,19.45 58.625,18.625 59.175,18.075 63.075,18.075 64.4,19.4 64.4,22.4 65.15,23.15 R32.2@65.15,28.5
NetR33_1: R33.1 U3.24 | length 3.2
  Top Layer w0.254: R33.1@92.7,27.7 94.075,26.325 U3.24@94.075,25.05
NetR34_1: R34.1 U4.24 | length 3.2
  Top Layer w0.254: R34.1@72.7,27.7 74.075,26.325 U4.24@74.075,25.05
NetR35_1: R35.1 U5.24 | length 3.2
  Top Layer w0.254: R35.1@52.7,27.7 54.075,26.325 U5.24@54.075,25.05
NetR36_2: R36.2 U3.6 | length 6.6
  Top Layer w0.254: R36.2@92,14.275 92.475,14.275 94.727,16.527 94.727,17 ; 94.725,17 U3.6@94.725,19.45
NetR37_2: R37.2 U4.6 | length 6.6
  Top Layer w0.254: R37.2@72,14.275 72.425,14.275 74.725,16.575 U4.6@74.725,19.45
NetR38_2: R38.2 U5.6 | length 6.6
  Top Layer w0.254: R38.2@52,14.275 52.425,14.275 54.725,16.575 U5.6@54.725,19.45
NetR39_2: R39.2 U3.9 | length 6.7
  Top Layer w0.254: U3.9@96.675,19.45 96.675,16.525 98.925,14.275 R39.2@99.5,14.275
NetR40_2: R40.2 U4.9 | length 6.7
  Top Layer w0.254: U4.9@76.675,19.45 76.675,16.5 78.9,14.275 R40.2@79.5,14.275
NetR41_2: R41.2 U5.9 | length 6.7
  Top Layer w0.254: U5.9@56.675,19.45 56.675,16.5 58.9,14.275 R41.2@59.5,14.275
NetR42_1: R42.1 R44.1 | length 5.1
  Top Layer w0.254: R42.1@38,29.3 38,29.6 39,30.6 40.8,30.6 R44.1@41.9,29.5
NetR43_1: R43.1 R45.1 | length 5
  Top Layer w0.254: R43.1@18,29.3 18,29.7 18.8,30.5 20.9,30.5 R45.1@21.9,29.5
NetR44_2: R44.2 U6.12 | length 16.7
  Top Layer w0.254: U6.12@38.625,19.45 38.625,18.65 39.2,18.075 42.875,18.075 44.4,19.6 44.4,22.3 45.15,23.05 R44.2@45.15,28.5
NetR45_2: R45.2 U7.12 | length 16.7
  Top Layer w0.254: U7.12@18.625,19.45 18.625,18.575 19.1,18.1 22.9,18.1 24.45,19.65 24.45,22.45 25.15,23.15 R45.2@25.15,28.5
NetR46_1: R46.1 U6.24 | length 3.2
  Top Layer w0.254: R46.1@32.7,27.7 34.075,26.325 U6.24@34.075,25.05
NetR47_1: R47.1 U7.24 | length 3.2
  Top Layer w0.254: R47.1@12.7,27.7 14.075,26.325 U7.24@14.075,25.05
NetR48_2: R48.2 U6.6 | length 6.6
  Top Layer w0.254: R48.2@32,14.275 32.425,14.275 34.725,16.575 U6.6@34.725,19.45
NetR49_2: R49.2 U7.6 | length 6.5
  Top Layer w0.254: R49.2@12,14.275 12.4,14.275 14.725,16.6 U7.6@14.725,19.45
NetR50_2: R50.2 U6.9 | length 6.7
  Top Layer w0.254: U6.9@36.675,19.45 36.675,16.5 38.9,14.275 R50.2@39.5,14.275
NetR51_2: R51.2 U7.9 | length 6.7
  Top Layer w0.254: U7.9@16.675,19.45 16.675,16.5 18.9,14.275 R51.2@19.5,14.275
NetR73_1: R73.1 U2.26 | length 5.5
  Top Layer w0.279: U2.26@64.156,65.131 64.156,66.071 64.379,66.294 R73.1@68.609,66.294
NRST: C22.1 C53.2 JP6.7 JP17.8 JP18.5 R26.1 U2.30 | length 98.7
  Top Layer w0.279: C53.2@41.159,83.947 44.196,83.947 ; JP6.7@42.926,96.52 42.926,94.996 44.196,93.726 44.196,83.947 ; v1(57.404,67.056) 56.642,67.818 55.88,67.818 53.594,70.104 52.578,70.104 52.07,70.612 52.07,71.882 46.228,77.724 46.228,81.915 44.196,83.947 ; v1(59.944,63.119) 61.839,63.119 62.156,63.436 U2.30@62.156,65.131 62.156,66.484 62.474,66.802 66.157,66.802 66.792,67.437 C22.1@66.792,68.161 R26.1@68.393,68.161 ; R26.1@68.531,68.199 R26.1@68.493,68.161 ; JP18.5@75.682,67.564 74.031,69.215 69.645,69.215 68.591,68.161 R26.1@68.493,68.161 ; R26.1@68.393,68.161 R26.1@68.443,68.111 R26.1@68.493,68.161 ; R26.1@68.393,68.161 R26.1@68.493,68.161
  Bottom Layer w0.279: v1(57.404,67.056) 57.404,64.516 58.801,63.119 v1(59.944,63.119) ; JP18.5@75.682,67.564 75.682,68.58 75.184,69.078 75.184,86.106 81.534,92.456 81.534,95.093 JP17.8@82.829,96.388
OSC1: C21.1 U2.34 Y1.1 | length 8.3
  Top Layer w0.254: Y1.1@58.044,69.431 Y1.1@58.044,69.337 ; Y1.1@58.054,69.45 58.044,69.091 Y1.1@58.044,69.337 ; U2.34@60.156,65.131 60.156,67.225 Y1.1@58.044,69.337
  Top Layer w0.508: C21.1@57.666,71.844 57.666,69.809 Y1.1@58.044,69.431
OSC2: C20.1 U2.33 Y1.2 | length 8.1
  Top Layer w0.254: U2.33@60.656,65.131 60.656,67.27 Y1.2@62.642,69.256 ; Y1.2@62.444,69.091 62.444,69.431 Y1.2@62.444,69.237
  Top Layer w0.508: Y1.2@62.444,69.431 62.822,69.809 C20.1@62.822,71.844
RX: Q5.3 R25.1 U2.2 | length 60.2
  Top Layer w0.254: Q5.3@40.894,89.421 40.894,88.138 v1(42.545,86.487) ; R25.1@41.109,81.915 v1(42.545,81.915) ; v1(52.832,55.626) 53.34,55.118 58.801,55.118 61.214,52.705 62.982,52.705 63.656,52.031 U2.2@65.756,52.031
  Bottom Layer w0.254: v1(42.545,86.487) v1(42.545,81.915) 42.545,59.195 43.955,57.785 52.324,57.785 53.13,56.979 53.13,56.928 ; v1(52.832,55.626) 52.832,55.842 53.13,56.14 53.13,56.356 ; 53.13,56.572 53.13,56.356 ; 53.13,56.712 53.13,56.928 ; 53.13,56.356 53.134,56.359 53.134,56.925 53.13,56.928
RXD1: R81.1 U2.45 | length 9.1
  Top Layer w0.254: R81.1@49.618,71.12 50.8,69.938 50.8,69.342 51.054,69.088 52.819,69.088 54.656,67.251 U2.45@54.656,65.131
SD_DET: JP17.7 U2.35 | length 51.3
  Top Layer w0.254: v1(59.172,67.183) 59.172,67.135 59.656,66.651 U2.35@59.656,65.131 ; v1(64.135,90.805) 80.899,90.805 82.829,92.735 JP17.7@82.829,93.848
  Bottom Layer w0.254: v1(59.172,67.183) 58.293,67.183 56.515,68.961 56.515,71.628 64.135,79.248 v1(64.135,90.805)
SD_MISO: JP17.1 JP18.1 U2.22 | length 46.2
  Top Layer w0.254: U2.22@65.756,62.031 65.764,62.023 67.983,62.023 68.6,62.64 v1(69.2,62.64)
  Bottom Layer w0.254: v1(69.2,62.64) 69.2,64.516 71.12,66.436 71.12,70.358 74.168,73.406 74.168,88.646 75.209,89.687 JP17.1@75.209,93.848 JP17.1@75.311,93.746 ; v1@69.215,62.484 69.215,62.23 69.215,61.525 69.7,61.04 75.01,61.04 75.682,61.712 JP18.1@75.682,62.484
SD_MOSI: JP17.6 JP18.4 U2.21 | length 44.4
  Top Layer w0.254: U2.21@65.756,61.531 68.144,61.531 68.453,61.84 v1(69.9,61.84)
  Bottom Layer w0.254: v1(69.9,61.84) 73.084,65.024 JP18.4@73.142,65.024 71.628,66.538 71.628,69.961 74.676,73.009 74.676,88.265 78.994,92.583 78.994,95.093 JP17.6@80.289,96.388